# Allegro board controller.brd
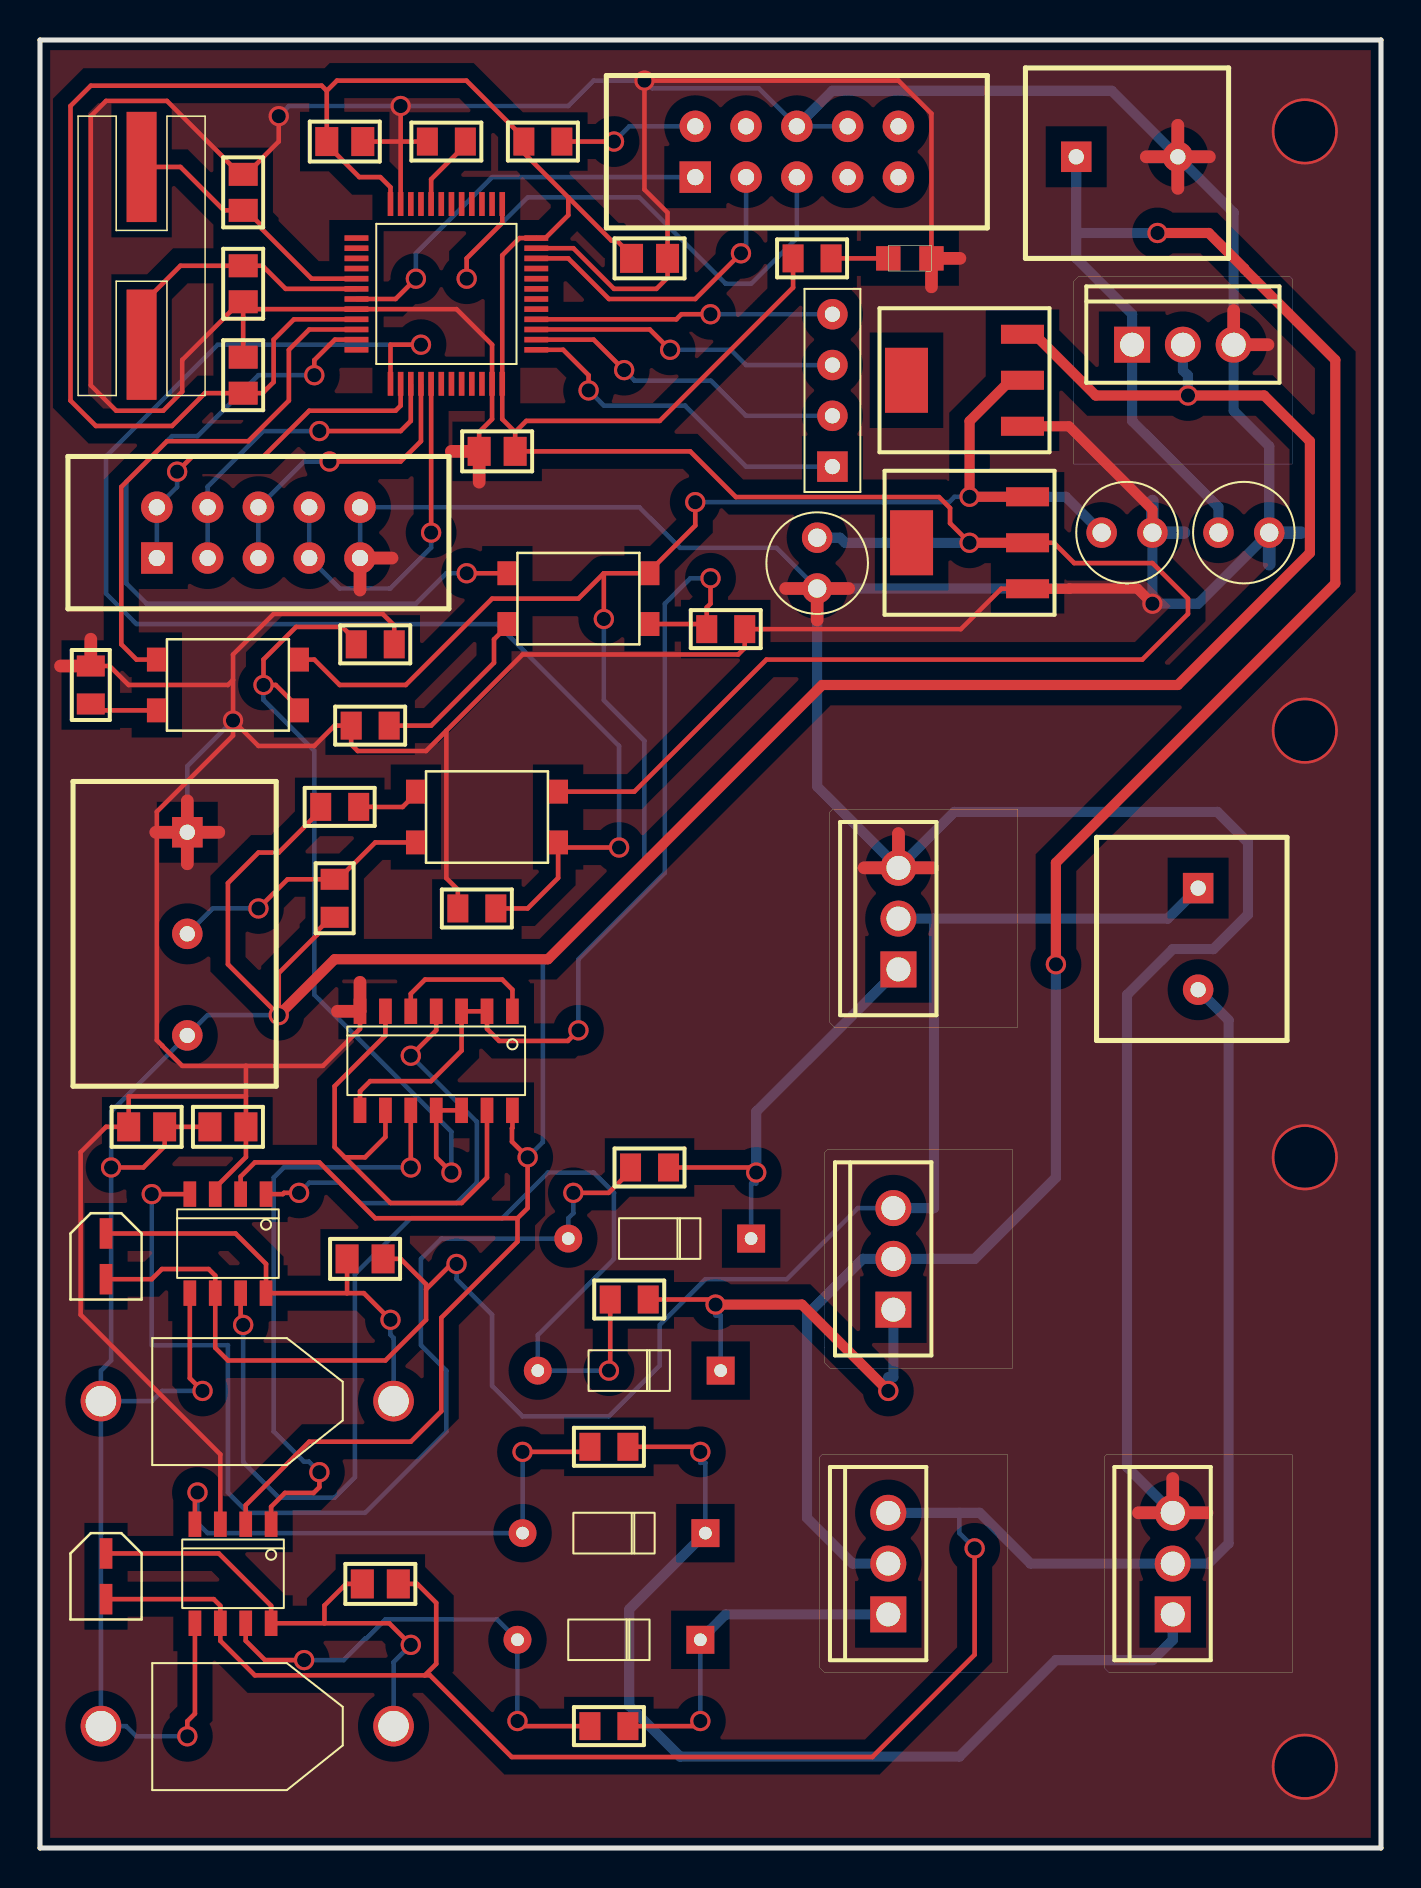
[diagram p0: board, top side]
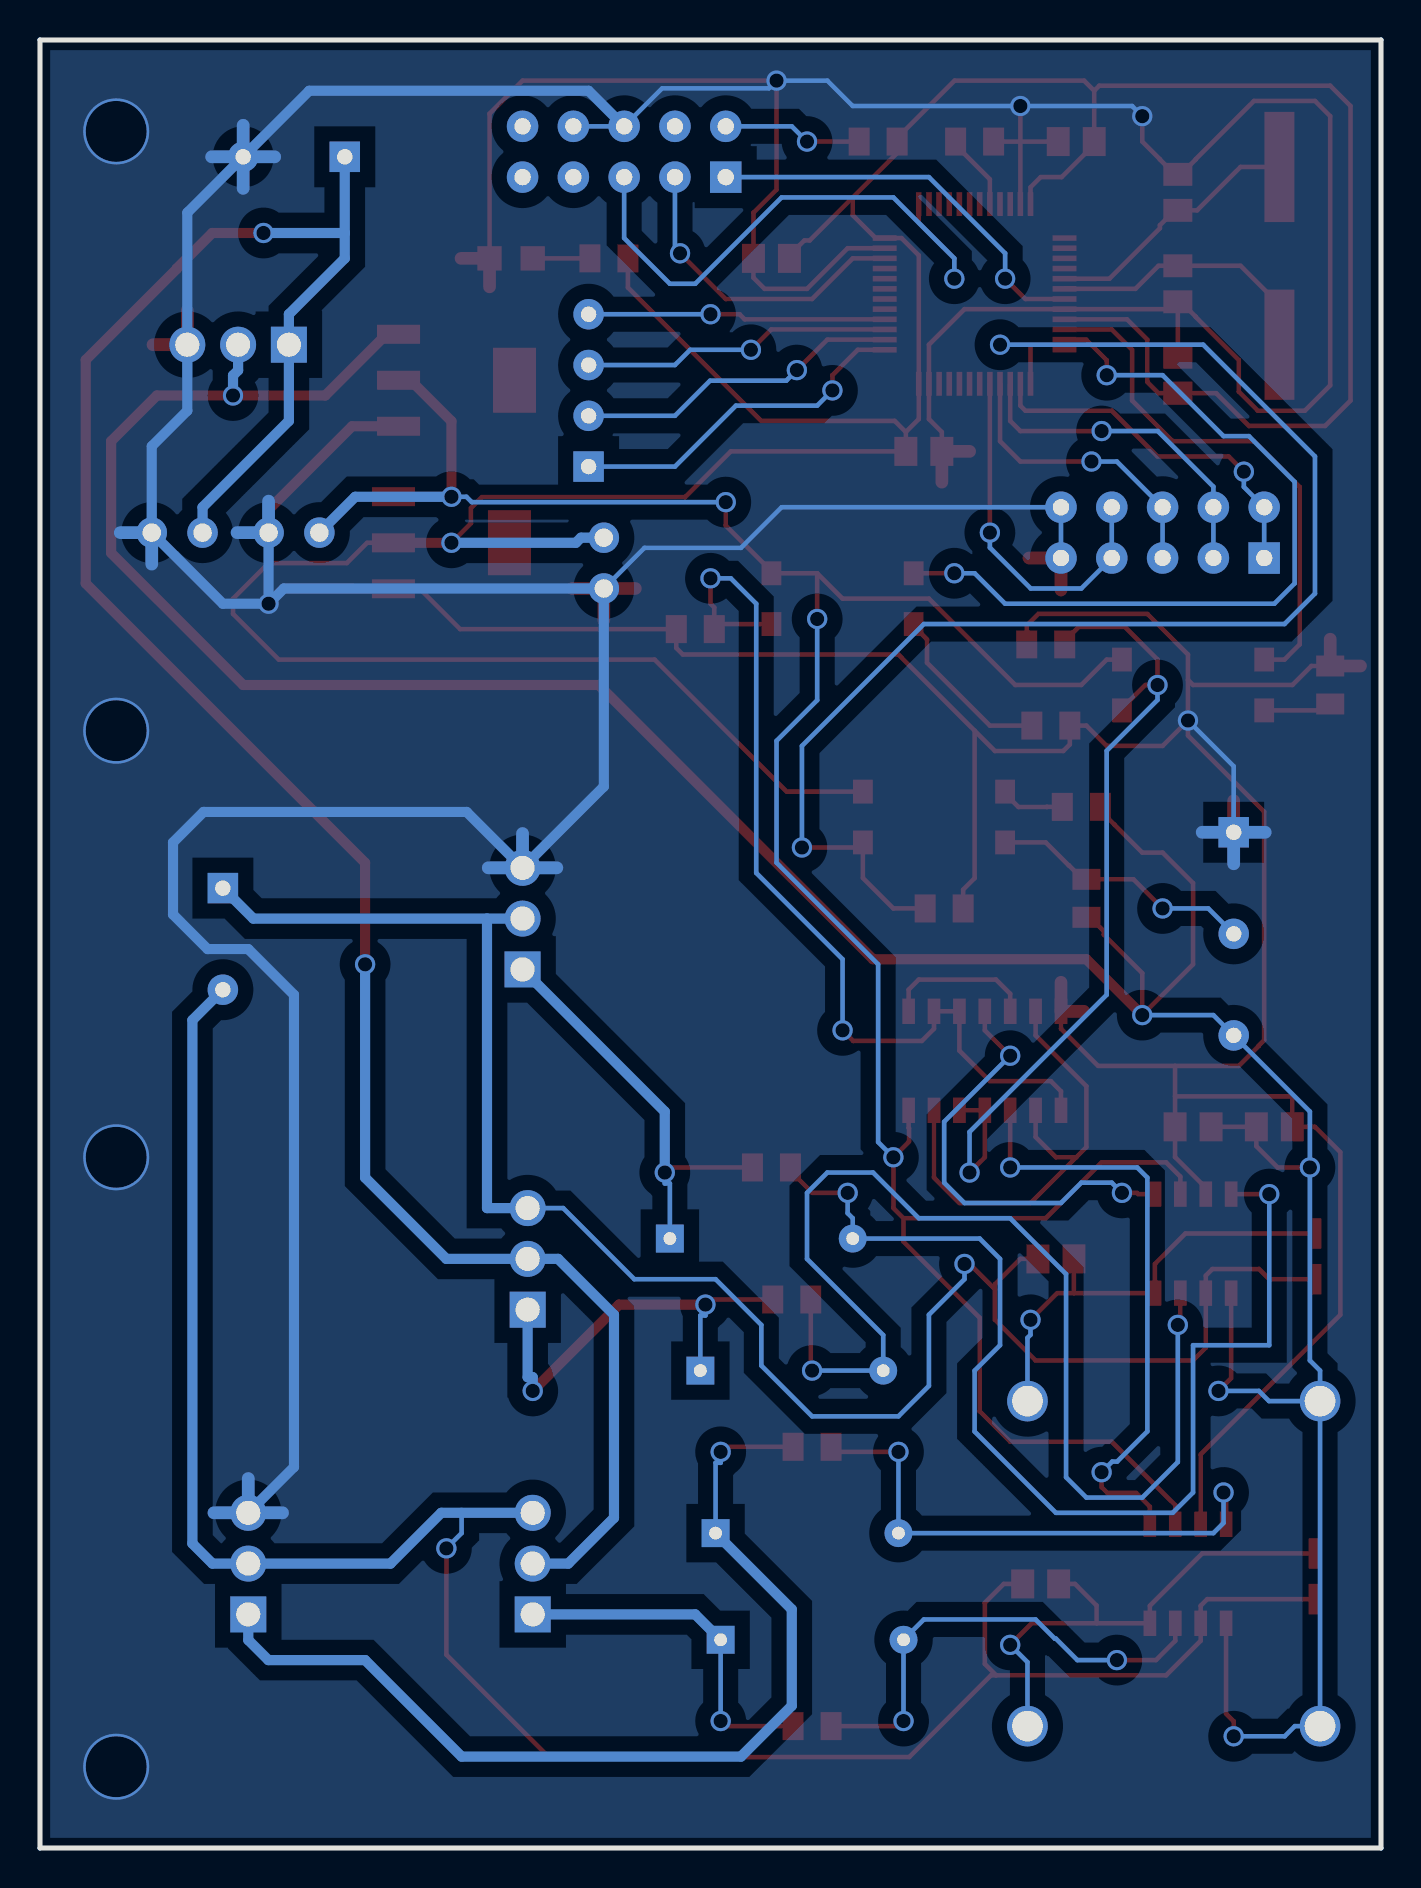
[diagram p1: board, bottom side, seen from below]

Outline 67.06 x 90.42 mm; copper layers: TOP, BOTTOM. Coordinates in mm from the lower left corner of the outline.
Outline path: 0,90.42 67.06,90.42 67.06,0 0,0 0,90.42

## Placement (name value [footprint] x y rotation side)
C1  4.7U  [CAP_0805]  10.16 73.66 90 top
C2  4.7U  [CAP_0805]  15.24 85.34 0 top
C3  104  [CAP_0805]  30.48 79.5 0 top
C4  104  [CAP_0805]  22.86 69.85 180 top
C5  30p  [CAP_0805]  10.16 82.8 90 top
C6  30p  [CAP_0805]  10.16 78.23 270 top
C8  4.7U  [CAP_0805]  9.4 36.07 0 top
C9  100N  [CAP_0805]  5.33 36.07 180 top
C12  4.7U  [CAP_ALLU]  3.3 29.97 270 top
C13  4.7U  [CAP_ALLU]  3.3 13.97 270 top
C14  100N  [CAP_0805]  17.02 13.21 0 top
C15  100N  [CAP_0805]  16.26 29.46 0 top
C17  10u  [CAP196]  58.93 65.79 270 top
C18  10u  [CAP196]  53.09 65.79 270 top
C19  10u  [CAP196]  38.86 65.53 180 top
D1  LED  [LED1_SMD]  42.42 79.5 0 top
D2  schottky  [DO201AD]  3.05 22.35 270 top
D3  schottky  [DO201AD]  3.05 6.1 270 top
D4  DIODE  [DO35]  34.04 23.88 90 top
D5  DIODE  [DO35]  35.56 30.48 90 top
D6  DIODE  [DO35]  33.02 10.41 90 top
D7  DIODE  [DO35]  33.27 15.75 90 top
ISO1  OPTO ISOLATOR  [OPTO_PC817SMD]  18.8 52.83 0 top
ISO2  OPTO ISOLATOR  [OPTO_PC817SMD]  5.84 59.44 0 top
ISO3  OPTO ISOLATOR  [OPTO_PC817SMD]  23.37 63.75 0 top
J1  HEADER 5X2  [HEADER_5X2]  32.77 83.57 90 top
J2  HEADER 2  [DOMINO_2]  51.82 84.58 0 top
J3  HEADER 5x2/M  [HEADER_5X2]  5.84 64.52 90 top
J5  HEADER 3  [DOMINO_3]  7.37 50.8 270 top
J6  HEADER 2  [DOMINO_2]  57.91 48.01 270 top
J9  HEADER 4  [HEADER_4]  39.62 69.09 180 top
Q1  MOSFET_DN_DGS  [TO220_HEAT]  42.67 29.46 180 top
Q2  MOSFET_DN_DGS  [TO220_HEAT]  42.93 46.48 180 top
Q3  MOSFET_DN_DGS  [TO220_HEAT]  42.42 14.22 180 top
Q4  MOSFET_DN_DGS  [TO220_HEAT]  56.64 14.22 180 top
R1  10k  [RES_0805]  20.32 85.34 0 top
R12  150  [RES_0805]  38.61 79.5 0 top
R13  4.7  [RES_0805]  29.46 27.43 0 top
R14  4.7  [RES_0805]  30.48 34.04 0 top
R15  4.7  [RES_0805]  28.45 6.1 0 top
R16  4.7  [RES_0805]  28.45 20.07 0 top
R19  330  [RES_0805]  25.15 85.34 0 top
R24  1k  [RES_0805]  14.73 47.5 270 top
R25  1k  [RES_0805]  14.99 52.07 0 top
R26  220  [RES_0805]  21.84 46.99 180 top
R27  220  [RES_0805]  2.54 58.17 90 top
R28  220  [RES_0805]  16.51 56.13 180 top
R29  330  [RES_0805]  16.76 60.2 180 top
R30  330  [RES_0805]  34.29 60.96 180 top
U1  STM32F103C8T6  [LQFP48]  20.32 77.72 0 top
U2  ir2184  [SOIC8]  9.4 30.23 270 top
U3  ir2184  [SOIC8]  9.65 13.72 270 top
U4  74hc02d  [SOIC14]  19.81 39.37 270 top
U5  L7812/TO220  [TO220_HEAT]  57.15 75.18 90 top
U6  asm1117-5  [ASM1117]  46.23 73.41 180 top
U7  asm1117-3  [ASM1117]  46.48 65.28 180 top
Y1  8MHz  [CRYSTAL_SMD]  5.08 75.18 90 top

## Library data of the parts
C1-C6 C8 C9 C14 C15 = C: User Part Number: PartNr
C12 C13 = C: User Part Number: ***
C17-C19 = C: Tolerance: ***; User Part Number: ***
D1 = LED
D2 D3 = DIODE: Tolerance: ***; User Part Number: ***
D4-D7 = DIODE
ISO1-ISO3 = OPTO ISOLATOR_0: User Part Number: ***
J1 = HEADER 5X2: User Part Number: ***
J2 J6 = HEADER 2: User Part Number: ***
J3 = HEADER 5x2/M: User Part Number: ***
J5 = HEADER 3: User Part Number: ***
J9 = HEADER 4
Q1-Q4 = MOSFET_DN_DGS_0: User Part Number: PartNr
R1 R12-R16 R19 R24-R30 = R: User Part Number: PartNr
U1 = STM32F103C8T6_0
U2 U3 = ir2184: Tolerance: ***; User Part Number: ***
U4 = 74hc02d: Tolerance: ***; User Part Number: ***
U5 = L7812/TO220_0: User Part Number: PartNr
U6 = L7812/TO220_1: User Part Number: PartNr
U7 = L7812/TO220_2: User Part Number: PartNr
Y1 = CRYSTAL: User Part Number: ***

## Footprints (pads in the part's own frame, mm; a bottom-side part is the same pattern mirrored in y, then rotated)
ASM1117
  rect 2.15x0.95 smd: 1(-2.9,2.3) 2(-2.9,0) 3(-2.9,-2.3)
  rect 2.15x3.25 smd: 4(2.9,0)
CAP196
  round 1.524 hole 0.914: 1(0,0) 2(0,2.54)
CAP_0805
  rect 1.15x1.45 smd: 1(-0.9,0) 2(0.9,0)
CAP_ALLU
  rect 1.524x0.635 smd: 1(-0.762,0) 2(1.524,0)
CRYSTAL_SMD
  rect 5.512x1.499 smd: 1(0,0) 2(8.89,0)
DO35
  rect 1.397x1.397 hole 0.635: 1(0,0)
  round 1.397 hole 0.635: 2(0,9.144)
DO201AD
  round 2.032 hole 1.524: 1(0,0) 2(0,14.63)
DOMINO_2
  rect 1.524x1.524 hole 0.762: 1(0,0)
  round 1.524 hole 0.762: 2(5.08,0)
DOMINO_3
  rect 1.524x1.524 hole 0.762: 1(0,0)
  round 1.524 hole 0.762: 2(5.08,0) 3(10.16,0)
HEADER_4
  rect 1.524x1.524 hole 0.762: 1(0,0)
  round 1.524 hole 0.762: 2(0,-2.54) 3(0,-5.08) 4(0,-7.62)
HEADER_5X2
  rect 1.575x1.575 hole 0.813: 1(0,0)
  round 1.575 hole 0.813: 2(2.54,0) 3(0,-2.54) 4(2.54,-2.54) 5(0,-5.08) 6(2.54,-5.08) 7(0,-7.62) 8(2.54,-7.62) 9(0,-10.16) 10(2.54,-10.16)
LED1_SMD
  rect 1.219x1.219 smd: 1(0,0) 2(2.159,0)
LQFP48
  rect 1.194x0.279 smd: 1(-4.496,2.794) 2(-4.496,2.286) 3(-4.496,1.778) 4(-4.496,1.27) 5(-4.496,0.762) 6(-4.496,0.254) 7(-4.496,-0.254) 8(-4.496,-0.762) 9(-4.496,-1.27) 10(-4.496,-1.778) 11(-4.496,-2.286) 12(-4.496,-2.794) 25(4.496,-2.794) 26(4.496,-2.286) 27(4.496,-1.778) 28(4.496,-1.27) 29(4.496,-0.762) 30(4.496,-0.254) 31(4.496,0.254) 32(4.496,0.762) 33(4.496,1.27) 34(4.496,1.778) 35(4.496,2.286) 36(4.496,2.794)
  rect 0.279x1.194 smd: 13(-2.794,-4.496) 14(-2.286,-4.496) 15(-1.778,-4.496) 16(-1.27,-4.496) 17(-0.762,-4.496) 18(-0.254,-4.496) 19(0.254,-4.496) 20(0.762,-4.496) 21(1.27,-4.496) 22(1.778,-4.496) 23(2.286,-4.496) 24(2.794,-4.496) 37(2.794,4.496) 38(2.286,4.496) 39(1.778,4.496) 40(1.27,4.496) 41(0.762,4.496) 42(0.254,4.496) 43(-0.254,4.496) 44(-0.762,4.496) 45(-1.27,4.496) 46(-1.778,4.496) 47(-2.286,4.496) 48(-2.794,4.496)
OPTO_PC817SMD
  rect 0.991x1.194 smd: 1(0,0) 2(0,-2.54) 3(7.112,-2.54) 4(7.112,0)
RES_0805
  rect 1.05x1.4 smd: 1(-0.95,0) 2(0.95,0)
SOIC8
  rect 1.27x0.635 smd: 1(-2.477,1.905) 2(-2.477,0.635) 3(-2.477,-0.635) 4(-2.477,-1.905) 5(2.477,-1.905) 6(2.477,-0.635) 7(2.477,0.635) 8(2.477,1.905)
SOIC14
  rect 1.27x0.635 smd: 1(-2.477,3.81) 2(-2.477,2.54) 3(-2.477,1.27) 4(-2.477,0) 5(-2.477,-1.27) 6(-2.477,-2.54) 7(-2.477,-3.81) 8(2.477,-3.81) 9(2.477,-2.54) 10(2.477,-1.27) 11(2.477,0) 12(2.477,1.27) 13(2.477,2.54) 14(2.477,3.81)
TO220_HEAT
  rect 1.8x1.8 hole 1.2: 1(0,2.54)
  round 1.8 hole 1.2: 2(0,0) 3(0,-2.54)

## Nets
3.3V: J1.2 R19.2
5V: C18.1 ISO2.4(COLLECTOR) ISO3.4(COLLECTOR) U2.2(SD) U3.2(SD) U4.14(VCC) U6.2(VOUT) U7.3(VIN)
12V: C8.1 C9.1 D2.1(A) D3.1(A) J5.3 R24.2 R25.1 U2.5(VCC) U3.5(VCC) U5.2(VOUT) U6.3(VIN)
24V: C17.1 J2.1 Q1.2(D) Q3.2(D) U5.1(VIN)
GND: C1.2 C2.2 C3.2 C4.2 C5.2 C6.2 C8.2 C9.2 C17.2 C18.2 C19.2 D1.2(CATHODE) J1.6 J1.8 J2.2 J3.9 J3.10 J5.1 Q2.3(S) Q4.3(S) R1.1 R26.2 R27.2 R28.2 R29.1 R30.1 U1.8(VSSA) U1.23(VSS1) U1.35(VSS2) U1.47(VSS3) U2.3(COM) U3.3(COM) U4.7(GND) U5.3(GND) U6.1(GND) U7.1(GND)
VCC: C1.1 C2.1 C3.1 C4.1 C19.1 ISO1.4(COLLECTOR) R12.1 R19.1 U1.9(VDDA) U1.24(VDD1) U1.36(VDD2) U1.48(VDD3) U7.2(VOUT)
DIR: ISO3.3(EMITTER) R30.2 U4.2(1A) U4.3(1B) U4.8(3A)
IN1: U2.1(IN) U4.4(2Y)
IN2: U3.1(IN) U4.10(3Y)
M+: C12.2 C15.2 J6.1 Q1.3(S) Q2.2(D) U2.6(VS)
M-: C13.2 C14.2 J6.2 Q3.3(S) Q4.2(D) U3.6(VS)
NRST: J1.1 U1.7(NRST)
PA0: ISO2.1(ANODE) U1.10(PA0)
PA1: ISO3.1(ANODE) U1.11(PA1)
PA2: U1.12(PA2)
PA3: ISO1.3(EMITTER) R26.1 U1.13(PA3)
PA4: J3.1 J3.2 U1.14(PA4)
PA5: J3.3 J3.4 U1.15(PA5)
PA6: J3.5 J3.6 U1.16(PA6)
PA7: J3.7 J3.8 U1.17(PA7)
PA8: U1.29(PA8)
PA9: U1.30(PA9)
PA10: U1.31(PA10)
PA11: U1.32(PA11)
PA12: U1.33(PA12)
PA15: U1.38(PA15)
PB0: U1.18(PB0)
PB1: U1.19(PB1)
PB2: U1.20(PB2)
PB3: U1.39(PB3)
PB4: U1.40(PB4)
PB5: U1.41(PB5)
PB6: U1.42(PB6)
PB7: U1.43(PB7)
PB8: U1.45(PB8)
PB9: U1.46(PB9)
PB10: U1.21(PB10)
PB11: U1.22(PB11)
PB12: J9.1 U1.25(PB12)
PB13: J9.2 U1.26(PB13)
PB14: J9.3 U1.27(PB14)
PB15: J9.4 U1.28(PB15)
PC13: U1.2(PC13)
PC14: U1.3(PC14)
PC15: U1.4(PC15)
PWM: ISO2.3(EMITTER) R29.2 U4.11(4A) U4.12(4B)
PWMN: U4.6(2B) U4.9(3B) U4.13(4Y)
SWC: J1.5 U1.37(PA14)
SWD: J1.3 U1.34(PA13)
N01446: C5.1 U1.5(PD0) Y1.2
N01458: C6.1 U1.6(PD1) Y1.1
N01827: R1.2 U1.44(BOOT0)
N03935: D1.1(ANODE) R12.2
N05460: C12.1 C15.1 D2.2(K) U2.8(VB)
N05467: C13.1 C14.1 D3.2(K) U3.8(VB)
N06316: D4.2(K) R13.1 U2.7(HO)
N06320: D4.1(A) Q1.1(G) R13.2
N06324: D5.2(K) R14.1 U2.4(LO)
N06328: D5.1(A) Q2.1(G) R14.2
N06332: D6.2(K) R15.1 U3.7(HO)
N06336: D6.1(A) Q3.1(G) R15.2
N06340: D7.2(K) R16.1 U3.4(LO)
N06344: D7.1(A) Q4.1(G) R16.2
N09539: U4.1(1Y) U4.5(2A)
N19722: ISO1.2(CATHODE) J5.2 R24.1
N19988: ISO1.1(ANODE) R25.2
N21174: ISO2.2(CATHODE) R27.1
N21432: ISO3.2(CATHODE) R28.1

Pads without a net: J1 4 7 9 10; U1 1; U6 4; U7 4

## Via types
v1: diameter 1.016, hole 0.711, TOP to BOTTOM, 59 vias
v2: diameter 3.302, hole 3.048, TOP to BOTTOM, 4 vias

## Routing (per net, layer and track width the routed paths; a pad name or vN(x,y) marks a point on that pad's centre or on a via; arc(x,y) is an arc through that point)
3.3V: length 7
  TOP w0.229: R19.2 v1(28.7,85.34)
  BOTTOM w0.229: v1(28.7,85.34) 29.46,86.11 J1.2
5V: length 134.7
  TOP w0.229: 23.88,31.5 16.76,31.5 13.97,34.29 10.74,34.29 10.03,33.58 U2.2 ; 23.88,31.5 24.38,32 v1(24.38,34.54) 23.6,35.33 23.6,36 23.62,36.02 U4.14 ; 23.88,31.5 23.88,30.33 20.07,26.52 20.07,21.84 18.54,20.32 13.46,20.32 10.29,17.15 U3.2 ; v1(28.19,61.47) 28.19,63.75 ; 28.19,63.75 26.92,62.48 22.61,62.48 18.29,58.17 14.99,58.17 13.72,59.44 ISO2.4 ; 28.19,63.75 ISO3.4 30.48,63.86 32.77,66.14 v1(32.77,67.31)
  TOP w0.508: U7.3 v1(46.48,67.58) 46.48,71.36 48.53,73.41 U6.2
  BOTTOM w0.229: v1(28.19,61.47) 28.19,57.4 30.23,55.37 30.23,49.28 25.15,44.2 25.15,35.31 v1(24.38,34.54) ; v1(32.77,67.31) 45.46,67.31 45.73,67.58 v1(46.48,67.58)
  BOTTOM w0.508: v1(46.48,67.58) 51.29,67.58 C18.1
12V: length 174.5
  TOP w0.229: C8.1 C9.1 6.23,35.1 5.17,34.04 v1(3.56,34.04) ; U3.5 7.75,6.72 7.37,6.34 v1(7.37,5.59) ; 7.49,27.75 7.49,23.5 v1(8.13,22.86) ; R24.2 14.56,46.55 13.86,45.85 13.86,45.68 11.94,43.75 v1(11.94,41.66) 9.4,44.2 9.4,48.26 10.92,49.78 11.94,49.78 13.34,51.19 13.34,51.2 14.04,51.89 R25.1
  TOP w0.508: v1(11.94,41.66) 14.73,44.45 25.4,44.45 39.12,58.17 56.9,58.17 63.5,64.77 63.5,70.36 61.21,72.64 v1(57.4,72.64) 52.79,72.64 49.73,75.71 U6.3
  BOTTOM w0.229: D2.1 D3.1 4.31,6.1 4.81,5.59 v1(7.37,5.59) ; D2.1 5.6,22.35 6.11,22.86 v1(8.13,22.86) ; D2.1 3.05,23.88 3.56,24.38 v1(3.56,34.04) 3.56,36.83 J5.3 8.38,41.66 v1(11.94,41.66)
  BOTTOM w0.508: v1(57.4,72.64) 57.4,73.65 57.15,73.9 U5.2
24V: length 114.5
  TOP w0.508: v1(55.88,80.77) 58.44,80.77 60.22,78.99 60.22,78.97 64.77,74.42 64.77,63.25 50.8,49.28 v1(50.8,44.2)
  BOTTOM w0.508: Q3.2 40.64,14.22 38.35,16.51 38.35,26.67 41.15,29.46 Q1.2 46.74,29.46 50.8,33.53 v1(50.8,44.2) ; v1(55.88,80.77) 51.82,80.77 ; 51.82,80.77 51.82,79.5 54.61,76.71 U5.1 54.61,71.37 58.93,67.06 C17.1 ; 51.82,80.77 J2.1
GND: length 548.1
  TOP w0.229: R26.2 20.89,47.93 20.32,48.51 20.32,55.88 ; U1.35 26.67,80.01 28.7,77.98 30.82,77.98 31.38,78.54 C3.2 31.38,81.79 30.23,82.94 v1(30.23,88.39) 42.93,88.39 44.58,86.74 D1.2 ; R1.1 18.03,85.34 ; 18.03,85.34 C2.2 ; 18.03,85.34 v1(18.03,87.12) ; 18.03,85.34 U1.47 ; 10.16,76.96 C6.2 10.01,77.33 9.26,76.59 9.26,76.57 7.11,74.42 7.11,72.84 6.16,71.88 3.81,71.88 2.54,73.15 2.54,86.61 3.3,87.38 6.35,87.38 9.26,84.46 9.26,84.45 10.01,83.7 C5.2 10.31,83.7 11.06,84.45 11.06,84.46 11.94,85.34 v1(11.94,86.61) ; 10.16,76.96 U1.8 20.83,76.96 22.61,75.18 U1.23 22.61,71.46 21.96,70.82 C4.2 ; 10.16,76.96 C1.2 ; 20.32,55.88 24.13,59.69 34.91,59.69 35.24,60.02 R30.1 46.05,60.96 48.07,62.98 U7.1 ; 20.32,55.88 19.3,54.86 15.89,54.86 15.56,55.19 R28.2 14.73,56.13 13.72,55.12 10.92,55.12 v1(9.65,56.39) ; U4.7 16,40.97 14.15,39.12 10.3,39.12 ; R27.2 3.48,59.12 4.43,58.17 9.4,58.17 9.65,58.42 ; v1(9.65,56.39) 9.65,55.64 5.84,51.83 5.84,40.4 6.11,40.13 6.11,40.12 7.11,39.12 10.3,39.12 ; v1(9.65,56.39) 9.65,58.42 ; 10.3,37.59 10.3,39.12 ; 10.3,37.59 4.43,37.59 C9.2 3.3,36.07 2.03,34.8 2.03,26.67 9.02,19.69 U3.3 ; 10.3,37.59 C8.2 10.3,34.55 8.76,33.02 U2.3 ; 9.65,58.42 9.65,59.69 11.68,61.72 17.13,61.72 17.71,61.14 R29.1
  TOP w0.508: U7.1 51.47,62.98 51.49,62.99 54.86,62.99 v1(55.63,62.23) ; C18.2 55.63,66.93 51.45,71.11 U6.1
  TOP w0.635: 16,43.29 U4.7 14.87,41.85 ; 54.93,16.76 Q4.3 ; Q4.3 58.36,16.76 ; Q4.3 56.64,18.48 ; J5.1 7.37,52.38 ; J5.1 5.79,50.8 ; J5.1 8.94,50.8 ; J5.1 7.37,49.22 ; C19.2 40.44,62.99 ; C19.2 37.29,62.99 ; C19.2 38.86,61.42 ; 55.32,84.58 J2.2 ; J2.2 58.47,84.58 ; J2.2 56.9,83.01 ; J2.2 56.9,86.16 ; 1.03,59.12 R27.2 2.54,60.45 ; 59.69,76.9 U5.3 61.4,75.18 ; 21.96,68.31 C4.2 20.57,69.85 ; 17.6,64.52 J3.9 16,62.92 ; 46,79.5 D1.2 44.58,78.08 ; Q2.3 42.93,50.74 ; Q2.3 44.64,49.02 ; Q2.3 41.21,49.02
  BOTTOM w0.229: C19.2 36.83,65.02 32,65.02 29.97,67.06 J3.10 J3.9 ; v1(9.65,56.39) 7.37,54.1 J5.1 ; J1.8 J1.6 35.95,88.01 30.61,88.01 v1(30.23,88.39) 27.69,88.39 26.42,87.12 v1(18.03,87.12) 12.45,87.12 v1(11.94,86.61)
  BOTTOM w0.508: J1.6 39.62,87.88 53.59,87.88 J2.2 59.69,81.79 U5.3 59.69,71.88 61.47,70.1 C17.2 57.91,62.23 v1(55.63,62.23) ; C18.2 v1(55.63,62.23) ; v1(55.63,62.23) 54.86,62.99 C19.2 38.86,53.09 Q2.3 45.72,51.82 58.88,51.82 60.4,50.29 60.4,46.69 58.67,44.96 56.64,44.96 54.36,42.67 54.36,19.05 Q4.3
  BOTTOM w0.635: 56.9,83.01 J2.2 ; J2.2 56.9,86.16 ; J2.2 55.32,84.58 ; J2.2 58.47,84.58 ; 7.37,49.22 J5.1 ; J5.1 8.94,50.8 ; J5.1 5.79,50.8 ; 63.04,65.79 C17.2 61.47,64.21 ; Q2.3 44.64,49.02 ; Q2.3 41.21,49.02 ; Q2.3 42.93,50.74 ; 55.63,67.36 C18.2 57.2,65.79 ; 54.93,16.76 Q4.3 ; Q4.3 56.64,18.48 ; Q4.3 58.36,16.76
  vias: v2(63.25,85.85) v2(63.25,55.88) v2(63.25,34.54) v2(63.25,4.06)
VCC: length 187.9
  TOP w0.229: U1.48 17.53,83.06 17.02,83.57 15.97,83.57 14.34,85.19 C2.1 14.34,87.88 ; 14.34,87.88 14.85,88.39 21.32,88.39 24.2,85.52 R19.1 24.2,84.77 26.42,82.55 ; 14.34,87.88 14.09,88.14 2.54,88.14 1.52,87.12 1.52,72.39 2.79,71.12 6.6,71.12 8.24,72.76 C1.1 11.13,72.76 11.68,73.32 11.68,75.44 12.7,76.45 U1.9 ; 26.42,82.55 26.42,81.66 25.27,80.52 U1.36 23.98,80.52 23.11,79.65 U1.24 23.11,71.46 23.76,70.82 ; 26.42,82.55 28.57,80.4 28.83,80.4 29.58,79.65 C3.1 ; 23.76,70.82 C4.1 32.51,69.85 34.8,67.56 44.96,67.56 45.51,67.02 45.51,66.25 v1(46.48,65.28) ; 23.76,70.82 24.32,71.37 30.99,71.37 37.66,78.04 R12.1 ; ISO1.4 29.72,52.83 36.32,59.44 55.12,59.44 57.4,61.72 57.4,62.48 55.63,64.26 51.71,64.26 50.7,65.28 U7.2
  TOP w0.508: v1(46.48,65.28) U7.2
  BOTTOM w0.508: v1(46.48,65.28) 40.26,65.28 40,65.53 C19.1
DIR: length 47.4
  TOP w0.229: v1(26.92,40.89) 26.39,40.36 22.96,40.36 22.35,40.97 U4.2 U4.3 21.08,39.88 19.56,38.35 16.51,38.35 16,37.85 U4.8 ; v1(33.53,63.5) 33.53,62.23 33.34,62.04 33.34,61.21 ; 33.34,61.21 ISO3.3 ; 33.34,61.21 R30.2
  BOTTOM w0.229: v1(26.92,40.89) 26.92,44.45 31.24,48.77 31.24,62.23 32.51,63.5 v1(33.53,63.5)
IN1: length 22.1
  TOP w0.229: v1(18.54,39.62) 19.81,40.89 U4.4 ; U2.1 12.14,32.7 12.2,32.77 v1(12.95,32.77)
  BOTTOM w0.229: v1(12.95,32.77) 13.46,33.27 14.99,33.27 16,32.26 20.83,32.26 21.84,33.27 21.84,36.32 v1(18.54,39.62)
IN2: length 30.2
  TOP w0.229: U3.1 11.56,17.07 12.25,17.76 13.68,17.76 13.97,18.05 v1(13.97,18.8) ; U4.10 v1(18.54,34.04)
  BOTTOM w0.229: v1(13.97,18.8) 13.44,19.33 13.19,19.33 11.68,20.84 11.68,33.53 12.19,34.04 v1(18.54,34.04)
M+: length 92.7
  TOP w0.229: 19.3,27.94 20.57,29.21 v1(20.83,29.21) ; 19.3,27.94 19.3,28.19 18.03,29.46 C15.2 ; 19.3,27.94 19.3,26.42 17.27,24.38 9.4,24.38 8.76,25.02 U2.6 8.76,28.63 8.43,28.96 6.1,28.96 5.59,28.45 C12.2
  BOTTOM w0.229: Q1.3 40.89,32 37.34,28.45 33.27,28.45 30.99,26.16 30.99,24.13 28.45,21.59 24.13,21.59 22.61,23.11 22.61,26.67 20.83,28.45 v1(20.83,29.21)
  BOTTOM w0.508: J6.1 56.39,46.48 44.7,46.48 ; Q1.3 44.7,32 44.7,46.48 ; 44.7,46.48 Q2.2
M-: length 110.2
  TOP w0.229: C13.2 8.69,12.45 9.02,12.12 U3.6 9.02,10.36 10.74,8.64 19.24,8.64 ; v1(46.74,14.99) 46.74,9.67 41.62,4.55 23.59,4.55 19.5,8.64 19.24,8.64 ; 19.24,8.64 19.81,9.21 19.81,12.26 18.87,13.21 C14.2
  BOTTOM w0.229: 45.97,16.76 45.97,15.75 v1(46.74,14.99)
  BOTTOM w0.508: Q3.3 46.99,16.76 49.53,14.22 Q4.2 58.43,14.22 59.44,15.23 59.44,41.4 J6.2
NRST: length 20.2
  TOP w0.229: U1.7 17.78,77.47 v1(18.8,78.49)
  BOTTOM w0.229: J1.1 22.61,83.57 18.8,79.76 v1(18.8,78.49)
PA0: length 26.5
  TOP w0.229: ISO2.1 4.83,59.44 4.06,60.2 4.06,68.07 6.35,70.36 10.41,70.36 12.45,72.39 12.45,74.93 13.46,75.95 U1.10
PA1: length 40.1
  TOP w0.229: v1(13.72,73.66) 13.72,74.41 14.48,75.17 14.48,75.17 14.75,75.44 U1.11 ; v1(21.34,63.75) ISO3.1
  BOTTOM w0.229: v1(21.34,63.75) 20.32,63.75 18.8,62.23 5.33,62.23 4.32,63.25 4.32,68.33 6.6,70.61 7.87,70.61 10.92,73.66 v1(13.72,73.66)
PA3: length 70.9
  TOP w0.229: 25.91,50.04 25.91,48.51 24.38,46.99 R26.1 ; 25.91,50.04 ISO1.3 ; 25.91,50.04 v1(28.96,50.04) ; v1(19.05,75.18) 17.53,75.18 U1.13
  BOTTOM w0.229: v1(28.96,50.04) 28.96,55.12 22.86,61.21 4.83,61.21 3.3,62.74 3.3,69.6 8.89,75.18 v1(19.05,75.18)
PA4: length 18.4
  TOP w0.229: U1.14 18.03,72.14 17.78,71.88 13.46,71.88 11.18,69.6 7.62,69.6 v1(6.86,68.83)
  BOTTOM w0.229: v1(6.86,68.83) 6.86,68.07 J3.2 J3.1
PA5: length 16.9
  TOP w0.229: v1(13.97,70.87) 18.03,70.87 18.54,71.37 U1.15
  BOTTOM w0.229: J3.3 J3.4 8.38,68.08 11.16,70.87 v1(13.97,70.87)
PA6: length 14.9
  TOP w0.229: U1.16 19.05,70.36 18.03,69.34 v1(14.48,69.34)
  BOTTOM w0.229: J3.5 J3.6 13.21,69.34 v1(14.48,69.34)
PA7: length 18.3
  TOP w0.229: U1.17 v1(19.56,65.79)
  BOTTOM w0.229: J3.8 J3.7 14.99,62.99 17.51,62.99 19.56,65.04 v1(19.56,65.79)
PB12: length 17.7
  TOP w0.229: v1(27.43,72.9) 27.43,73.66 26.16,74.93 U1.25
  BOTTOM w0.229: v1(27.43,72.9) 28.19,72.14 32.26,72.14 35.31,69.09 J9.1
PB13: length 16.4
  TOP w0.229: U1.26 27.69,75.44 v1(29.21,73.91)
  BOTTOM w0.229: v1(29.21,73.91) 29.74,73.38 33.55,73.38 35.31,71.63 J9.2
PB14: length 15.5
  TOP w0.229: v1(31.51,74.93) 30.49,75.95 U1.27
  BOTTOM w0.229: v1(31.51,74.93) 34.54,74.93 35.31,74.17 J9.3
PB15: length 14.9
  TOP w0.229: U1.28 31.82,76.45 32.07,76.71 v1(33.53,76.71)
  BOTTOM w0.229: J9.4 v1(33.53,76.71)
PWM: length 42.5
  TOP w0.229: 20.07,36.89 19.81,36.64 19.81,34.54 v1(20.57,33.78) ; 20.07,36.89 U4.11 ; 20.07,36.89 U4.12 ; ISO2.3 12.95,57 11.79,58.17 v1(11.18,58.17) 11.18,59.44 12.8,61.07 15.12,61.07 15.81,60.37 R29.2
  BOTTOM w0.229: v1(20.57,33.78) 20.57,35.81 13.72,42.67 13.72,54.88 11.18,57.42 v1(11.18,58.17)
PWMN: length 24.3
  TOP w0.229: U4.9 17.27,35.56 16.26,34.54 15.24,34.54 ; U4.6 17.27,40.64 14.73,38.1 14.73,35.05 15.24,34.54 ; U4.13 22.35,33.53 21.08,32.26 17.53,32.26 15.24,34.54
SWC: length 29
  TOP w0.229: v1(21.34,78.49) 21.34,79.5 23.11,81.28 U1.37
  BOTTOM w0.229: J1.5 37.85,80.52 35.56,78.23 34.29,78.23 29.97,82.55 24.38,82.55 21.34,79.5 v1(21.34,78.49)
SWD: length 16.1
  TOP w0.229: U1.34 26.42,79.5 28.45,77.47 32.77,77.47 v1(35.05,79.76)
  BOTTOM w0.229: v1(35.05,79.76) 35.31,79.76 J1.3
N01446: length 13.1
  TOP w0.229: U1.5 13.58,78.49 11.06,81.01 11.06,81.16 10.31,81.9 C5.1 9.19,81.9 7.02,84.07 Y1.2
N01458: length 14
  TOP w0.229: U1.6 12.28,77.98 11.13,79.13 C6.1 7.02,79.13 5.08,77.19 Y1.1
N01827: length 3.8
  TOP w0.229: U1.44 19.56,83.46 21.27,85.17 R1.2
N03935: length 2.9
  TOP w0.229: R12.2 D1.1
N05460: length 22.7
  TOP w0.229: v1(17.53,26.42) 16.19,27.75 15.36,27.75 ; 15.36,27.75 U2.8 11.3,29.21 9.78,30.73 C12.1 ; 15.36,27.75 C15.1
  BOTTOM w0.229: v1(17.53,26.42) 17.53,25.67 17.68,25.51 D2.2
N05467: length 25.3
  TOP w0.229: v1(18.54,10.16) 17.46,11.24 14.22,11.24 ; C13.1 8.94,14.73 11.56,12.12 U3.8 14.22,11.24 ; 14.22,11.24 14.22,12.13 15.3,13.21 C14.1
  BOTTOM w0.229: v1(18.54,10.16) 17.68,9.3 D3.2
N06316: length 58.6
  TOP w0.229: R13.1 28.51,23.88 v1(28.45,23.88) ; v1(10.16,26.16) 10.03,26.16 U2.7
  BOTTOM w0.229: v1(10.16,26.16) 10.16,19.3 11.94,17.53 14.73,17.53 15.75,18.54 15.75,28.7 18.54,31.5 23.11,31.5 25.4,33.78 27.69,33.78 28.7,32.77 28.7,29.46 24.89,25.65 D4.2 v1(28.45,23.88)
N06320: length 21.9
  TOP w0.229: v1(33.78,27.18) 33.78,27.43 R13.2
  TOP w0.508: v1(42.42,22.86) 38.1,27.18 v1(33.78,27.18)
  BOTTOM w0.229: v1(33.78,27.18) 33.78,26.63 34.04,26.63 D4.1
  BOTTOM w0.508: v1(42.42,22.86) 42.42,23.55 42.67,23.55 Q1.1
N06324: length 56.5
  TOP w0.229: v1(26.67,32.77) 28.44,32.77 29.53,33.86 R14.1 ; 7.49,32.7 v1(5.59,32.7)
  BOTTOM w0.229: v1(5.59,32.7) 5.59,25.15 9.4,25.15 9.4,17.78 10.41,16.76 16.26,16.76 20.32,20.83 20.32,23.88 19.05,25.15 19.05,29.46 20.07,30.48 D5.2 26.42,31.5 26.67,31.75 v1(26.67,32.77)
N06328: length 21.3
  TOP w0.229: v1(35.81,33.78) 35.81,34.04 R14.2
  BOTTOM w0.229: D5.1 35.56,33.24 35.81,33.24 v1(35.81,33.78)
  BOTTOM w0.508: v1(35.81,33.78) 35.81,36.83 Q2.1
N06332: length 24.1
  TOP w0.229: R15.1 23.88,6.1 v1(23.88,6.35) ; U3.7 10.29,10.36 11.25,9.4 v1(13.21,9.4)
  BOTTOM w0.229: v1(13.21,9.4) 15.18,9.4 16.26,10.47 16.31,10.47 17.27,11.43 22.86,11.43 D6.2 v1(23.88,6.35)
N06336: length 17.9
  TOP w0.229: v1(33.02,6.35) 33.02,6.1 R15.2
  BOTTOM w0.229: v1(33.02,6.35) D6.1
  BOTTOM w0.508: Q3.1 34.29,11.68 D6.1
N06340: length 27.4
  TOP w0.229: R16.1 27.5,19.81 v1(24.13,19.81) ; v1(7.87,17.78) 7.75,17.78 U3.4
  BOTTOM w0.229: v1(7.87,17.78) 7.87,16.26 8.38,15.75 D7.2 v1(24.13,19.81)
N06344: length 50.3
  TOP w0.229: R16.2 33.02,20.07 v1(33.02,19.81)
  BOTTOM w0.229: v1(33.02,19.81) 33.02,19.27 33.27,19.27 D7.1
  BOTTOM w0.508: Q4.1 56.64,10.4 55.64,9.4 50.8,9.4 45.97,4.57 32,4.57 29.46,7.11 29.46,11.94 D7.1
N09539: length 7.5
  TOP w0.229: U4.1 23.62,42.93 23.11,43.43 19.25,43.43 18.54,42.72 U4.5
N19722: length 13.3
  TOP w0.229: ISO1.2 16.76,50.29 15.62,49.14 15.6,49.14 14.91,48.45 R24.1 12.38,48.45 v1(10.92,46.99)
  BOTTOM w0.229: J5.2 8.64,46.99 v1(10.92,46.99)
N19988: length 3.2
  TOP w0.229: R25.2 16.7,52.07 16.71,52.06 18.13,52.06 18.8,52.73 ISO1.1
N21174: length 3.6
  TOP w0.229: R27.1 2.54,56.9 ISO2.2
N21432: length 8.8
  TOP w0.229: ISO3.2 23.37,61.11 22.7,60.45 22.7,59.28 19.56,56.13 R28.1

## Copper pours and planes (outline as drawn; the poured copper is in the pictures)
GND on TOP, BOTTOM: 0.51,0.51 0.51,89.92 66.55,89.92 66.55,0.51

## Text on the board
DEVICE_TYPE_TOP: FIGURE | SIZE | 25.0 | 28.0 | 30.0 | 32.0 | 36.0 | 47.24 | 60.0 | 120.0 | DRILL CHART: TOP to BOTTOM | ALL UNITS ARE IN MILS | TOLERANCE | +0.0/-0.0 | +3.94/-3.94 | PLATED | QTY | 8 | 59 | 11 | 2 | 18 | 6 | 15 | 4
